# Altium PCB Tigershark 3D R1.3.PcbDoc (part 3 of 3)
Units mm, origin at the board's own origin, x right, y up, seen from the top; angles counter-clockwise.
Board outline 142.49 x 111.76 mm, 4 copper layers (Top Layer, Groun Plane, Power Plane, Bottom Layer); 253 components, 276 nets, 982 pads, 750 vias.
Unrouted connection lines stored in the file: 262.
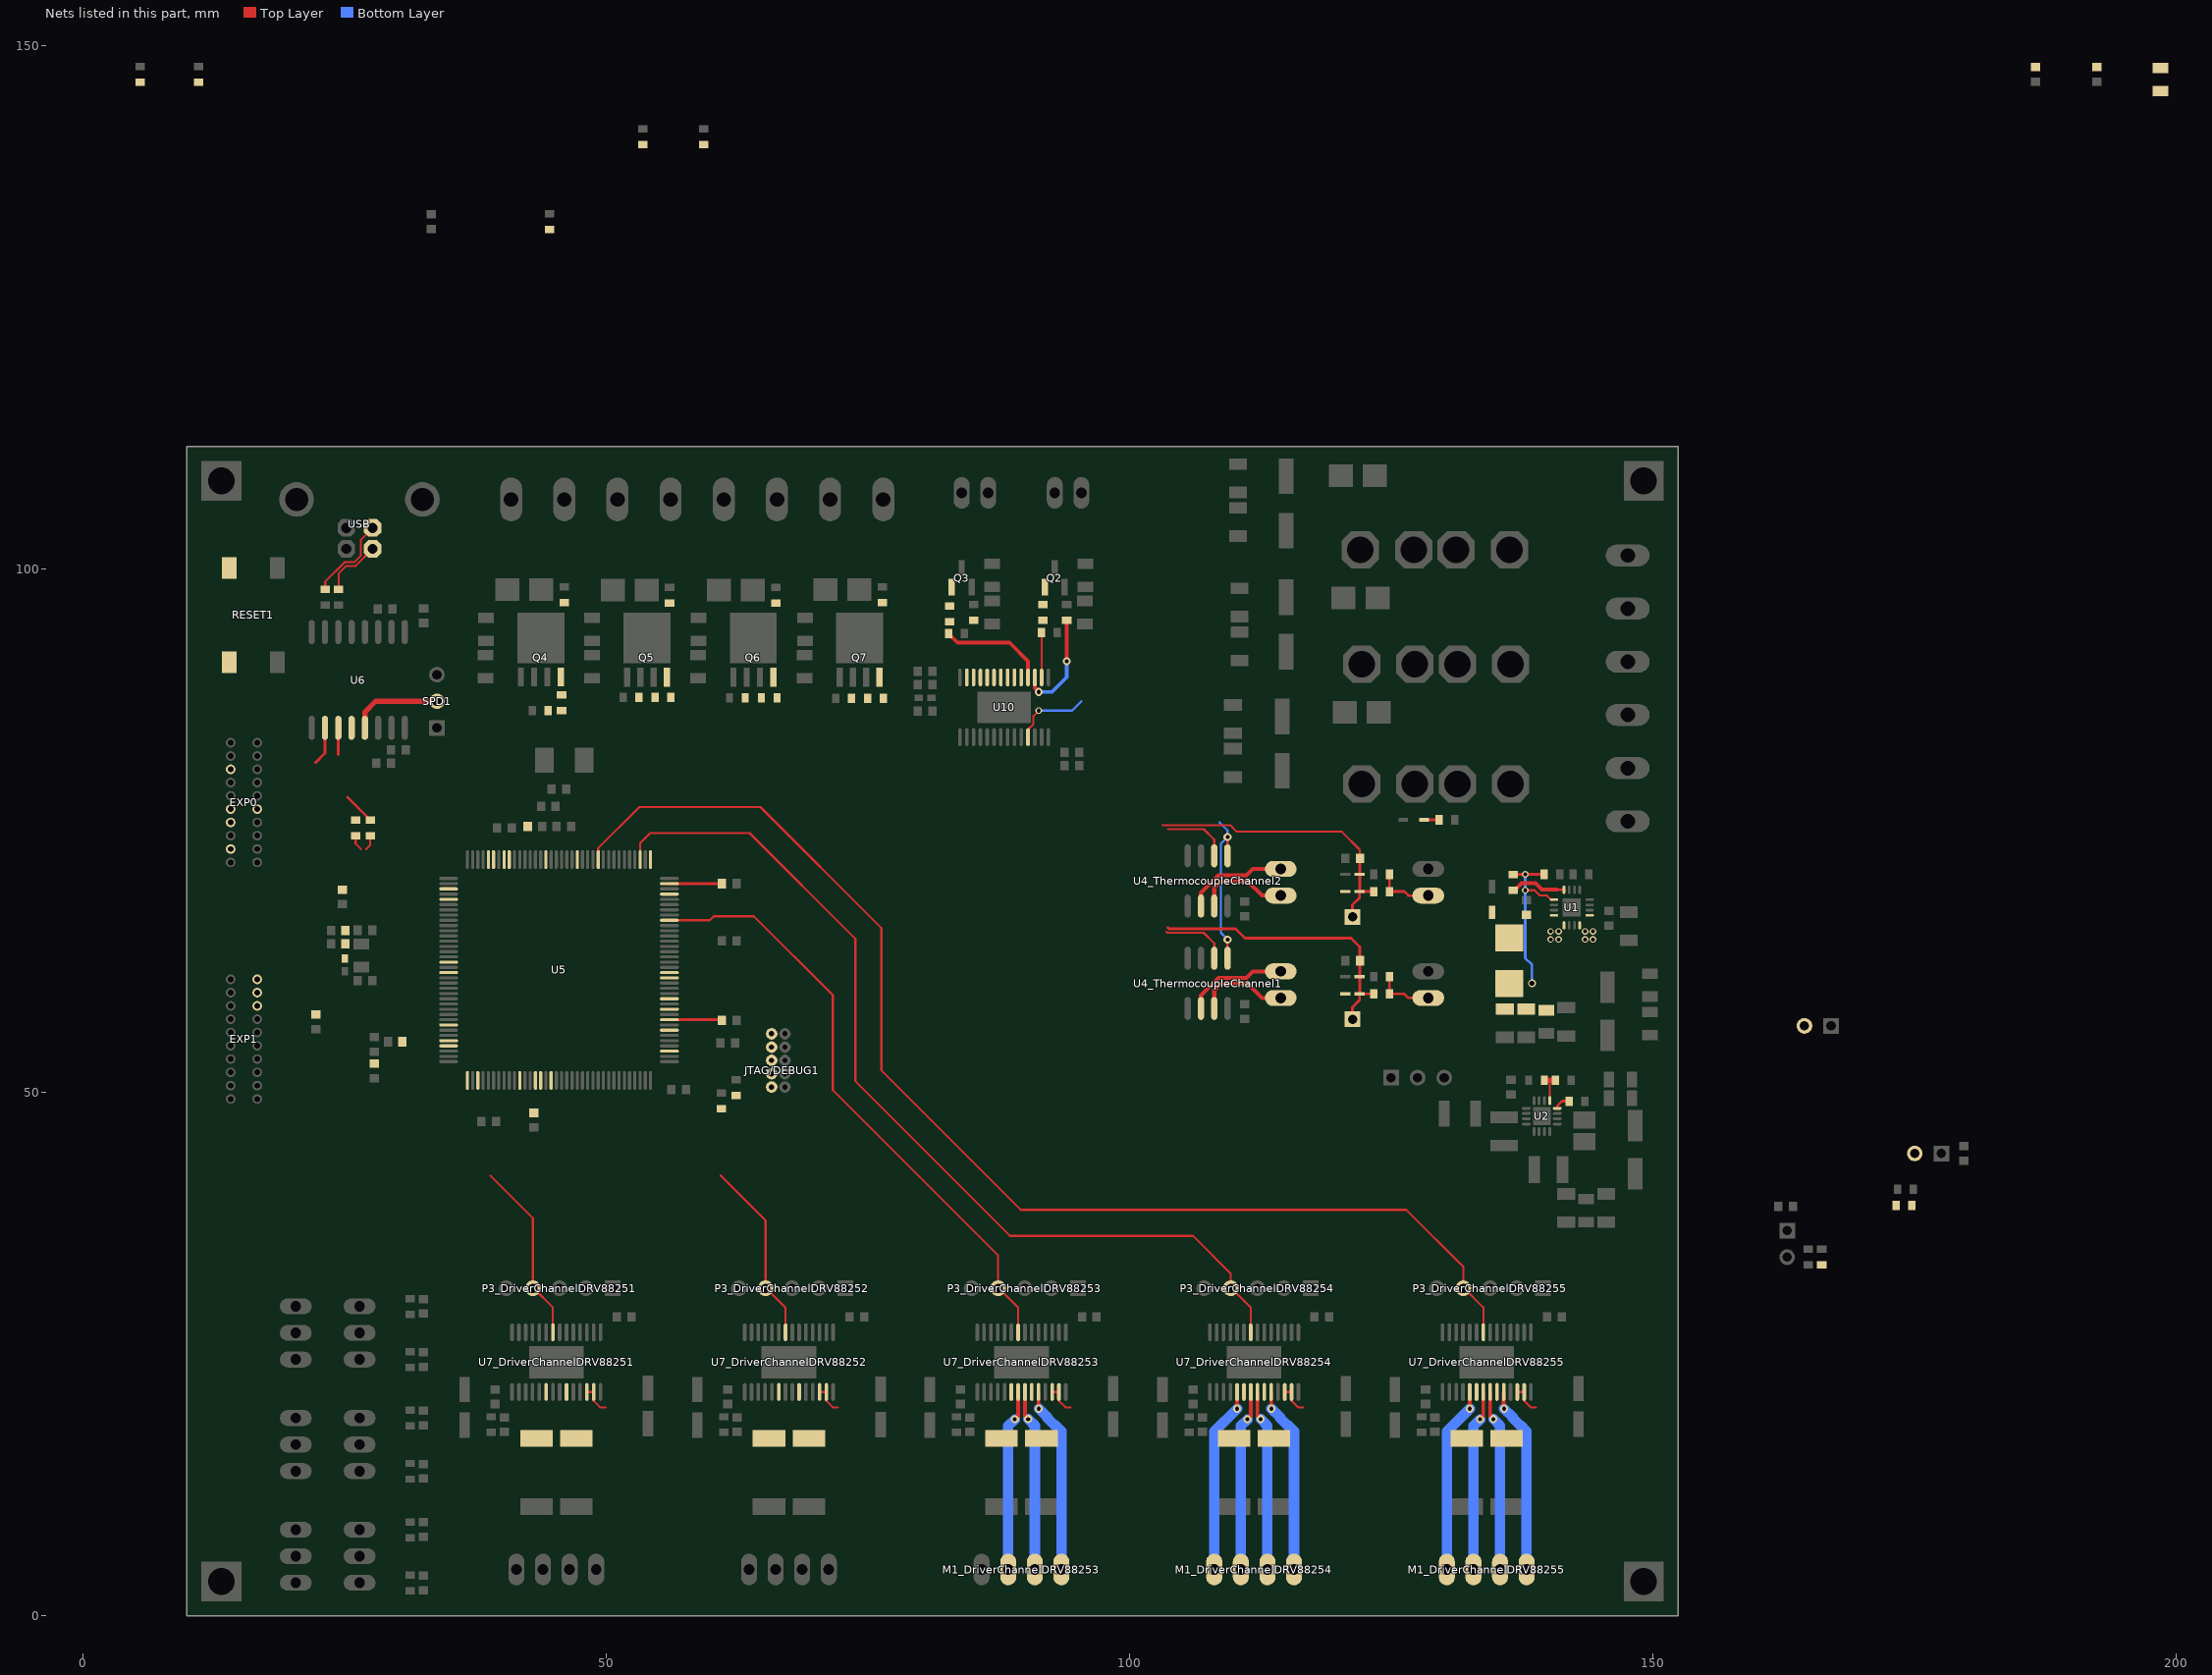
[diagram p5: the nets of this part, all layers, seen from the top]

## Via types
v1: diameter 0.635, hole 0.381, Top Layer to Bottom Layer, 336 vias
v2: diameter 0.762, hole 0.381, Top Layer to Bottom Layer, 305 vias
v3: diameter 0.5, hole 0.2, Top Layer to Bottom Layer, 90 vias
v4: diameter 1.27, hole 0.508, Top Layer to Bottom Layer, 15 vias
v5: diameter 0.762, hole 0.508, Top Layer to Bottom Layer, 3 vias
v6: diameter 1.27, hole 0.711, Top Layer to Bottom Layer, 1 vias

## Nets (pads, with @x,y where several pads share a name; then routed paths per layer and width w, separated by ;. In a path a pad name is that pad's centre, name@x,y a point inside that pad or via, vN(x,y) a via of type N, cw(c..) or ccw(c..) an arc to the next point about the centre after c; other vN are vias at no path point) (continued)
NetM1_DriverChannelDRV88253_2: M1_DriverChannelDRV88253.2 U7_DriverChannelDRV88253.7 | length 17.4
  Top Layer w0.356: v2(89.027,18.796) 89.337,19.106 U7_DriverChannelDRV88253.7@89.337,21.407
  Bottom Layer w0.991: M1_DriverChannelDRV88253.2@88.392,4.445 88.392,18.161 v2(89.027,18.796)
NetM1_DriverChannelDRV88253_3: M1_DriverChannelDRV88253.3 U7_DriverChannelDRV88253.8 | length 16.9
  Top Layer w0.356: 89.987,19.132 U7_DriverChannelDRV88253.8@89.987,21.407
  Bottom Layer w0.991: v2(90.297,18.822) 90.932,18.187 M1_DriverChannelDRV88253.3@90.932,4.445
NetM1_DriverChannelDRV88253_4: M1_DriverChannelDRV88253.4 U7_DriverChannelDRV88253.10 | length 17.8
  Top Layer w0.356: v2@91.287,19.888 U7_DriverChannelDRV88253.10@91.287,21.407
  Bottom Layer w0.991: v2(91.313,19.812) 92.126,18.999 92.126,18.926 92.84,18.212 92.913,18.212 93.472,17.653 M1_DriverChannelDRV88253.4@93.472,4.445
NetM1_DriverChannelDRV88254_1: M1_DriverChannelDRV88254.1 U7_DriverChannelDRV88254.5 | length 17.9
  Top Layer w0.356: v2(110.262,19.812) U7_DriverChannelDRV88254.5@110.262,21.407
  Bottom Layer w0.991: M1_DriverChannelDRV88254.1@108.077,4.445 108.077,17.627 v2(110.262,19.812)
NetM1_DriverChannelDRV88254_2: M1_DriverChannelDRV88254.2 U7_DriverChannelDRV88254.7 | length 17.4
  Top Layer w0.356: v2(111.252,18.796) 111.562,19.106 U7_DriverChannelDRV88254.7@111.562,21.407
  Bottom Layer w0.991: M1_DriverChannelDRV88254.2@110.617,4.445 110.617,18.161 v2(111.252,18.796)
NetM1_DriverChannelDRV88254_3: M1_DriverChannelDRV88254.3 U7_DriverChannelDRV88254.8 | length 16.9
  Top Layer w0.356: 112.212,19.132 U7_DriverChannelDRV88254.8@112.212,21.407
  Bottom Layer w0.991: v2(112.522,18.822) 113.157,18.187 M1_DriverChannelDRV88254.3@113.157,4.445
NetM1_DriverChannelDRV88254_4: M1_DriverChannelDRV88254.4 U7_DriverChannelDRV88254.10 | length 17.8
  Top Layer w0.356: v2@113.512,19.888 U7_DriverChannelDRV88254.10@113.512,21.407
  Bottom Layer w0.991: v2(113.538,19.812) 114.351,18.999 114.351,18.926 115.065,18.212 115.138,18.212 115.697,17.653 M1_DriverChannelDRV88254.4@115.697,4.445
NetM1_DriverChannelDRV88255_1: M1_DriverChannelDRV88255.1 U7_DriverChannelDRV88255.5 | length 17.9
  Top Layer w0.356: v2(132.487,19.812) U7_DriverChannelDRV88255.5@132.487,21.407
  Bottom Layer w0.991: M1_DriverChannelDRV88255.1@130.302,4.445 130.302,17.627 v2(132.487,19.812)
NetM1_DriverChannelDRV88255_2: M1_DriverChannelDRV88255.2 U7_DriverChannelDRV88255.7 | length 17.4
  Top Layer w0.356: v2(133.477,18.796) 133.787,19.106 U7_DriverChannelDRV88255.7@133.787,21.407
  Bottom Layer w0.991: M1_DriverChannelDRV88255.2@132.842,4.445 132.842,18.161 v2(133.477,18.796)
NetM1_DriverChannelDRV88255_3: M1_DriverChannelDRV88255.3 U7_DriverChannelDRV88255.8 | length 16.9
  Top Layer w0.356: 134.437,19.132 U7_DriverChannelDRV88255.8@134.437,21.407
  Bottom Layer w0.991: v2(134.747,18.822) 135.382,18.187 M1_DriverChannelDRV88255.3@135.382,4.445
NetM1_DriverChannelDRV88255_4: M1_DriverChannelDRV88255.4 U7_DriverChannelDRV88255.10 | length 17.8
  Top Layer w0.356: v2@135.737,19.888 U7_DriverChannelDRV88255.10@135.737,21.407
  Bottom Layer w0.991: v2(135.763,19.812) 136.576,18.999 136.576,18.926 137.29,18.212 137.363,18.212 137.922,17.653 M1_DriverChannelDRV88255.4@137.922,4.445
NetP2_ThermistorChannel1_1: P2_ThermistorChannel1.1 R13_ThermistorChannel1.1 R14_ThermistorChannel1.2 | length 5.5
  Top Layer w0.254: R13_ThermistorChannel1.1@124.829,61.087 R14_ThermistorChannel1.2@124.829,59.436 126.238,59.436 126.619,59.055 P2_ThermistorChannel1.1@128.524,59.055
NetP2_ThermistorChannel2_1: P2_ThermistorChannel2.1 R13_ThermistorChannel2.1 R14_ThermistorChannel2.2 | length 5.5
  Top Layer w0.254: R13_ThermistorChannel2.1@124.829,70.866 R14_ThermistorChannel2.2@124.829,69.215 126.238,69.215 126.619,68.834 P2_ThermistorChannel2.1@128.524,68.834
NetQ2_1: Q2.1 R45.2
NetQ3_1: Q3.1 R52.2
NetQ4_4: Q4.4 R58.2
NetQ5_4: Q5.4 R62.2
NetQ6_4: Q6.4 R66.2
NetQ7_4: Q7.4 R70.2
NetR12_1: R12.1 U2.4 | length 1.5
  Top Layer w0.254: U2.4@140.849,48.513 140.849,48.73 141.305,49.186 R12.1@141.977,49.186
NetR14_1: R14.1 U10.3 | length 10.2
  Top Layer w0.356: U10.3@90.932,89.674 90.932,88.673 v2(91.313,88.292) ; v2(93.98,91.213) R14.1@93.98,95.135
  Bottom Layer w0.356: v2(91.313,88.292) 92.583,88.292 93.98,89.689 v2(93.98,91.213)
NetR15_1: R15.1 R16.1 U5.129
NetR17_2: R17.2 U6.10 | length 3.7
  Top Layer w0.254: 22.213,81.534 23.114,82.435 U6.10@23.114,84.858
NetR18_2: R18.2 USB.2 | length 5.7
  Top Layer w0.203: R18.2@24.409,98.108 24.409,99.593 25.146,100.33 26.04,100.33 USB.2@27.666,101.956
NetR19_2: R19.2 U6.11 | length 5.6
  Top Layer w0.254: 24.384,82.308 U6.11@24.384,84.858 ; 25.261,78.232 R19.2@27.432,76.061
NetR20_2: R20.2 USB.3 | length 8.3
  Top Layer w0.203: R20.2@23.139,98.108 23.139,98.831 24.994,100.686 25.893,100.686 26.543,101.336 26.543,102.839 USB.3@27.666,103.962
NetR23_2: R23.2 R28.2 TRST1.2
NetR31_1: 
NetR32_DriverChannelDRV88251_2: R32_DriverChannelDRV88251.2 U7_DriverChannelDRV88251.9
NetR32_DriverChannelDRV88252_2: R32_DriverChannelDRV88252.2 U7_DriverChannelDRV88252.9
NetR32_DriverChannelDRV88253_2: R32_DriverChannelDRV88253.2 U7_DriverChannelDRV88253.9
NetR32_DriverChannelDRV88254_2: R32_DriverChannelDRV88254.2 U7_DriverChannelDRV88254.9
NetR32_DriverChannelDRV88255_2: R32_DriverChannelDRV88255.2 U7_DriverChannelDRV88255.9
NetR33_DriverChannelDRV88251_2: R33_DriverChannelDRV88251.2 U7_DriverChannelDRV88251.6
NetR33_DriverChannelDRV88252_2: R33_DriverChannelDRV88252.2 U7_DriverChannelDRV88252.6
NetR33_DriverChannelDRV88253_2: R33_DriverChannelDRV88253.2 U7_DriverChannelDRV88253.6
NetR33_DriverChannelDRV88254_2: R33_DriverChannelDRV88254.2 U7_DriverChannelDRV88254.6
NetR33_DriverChannelDRV88255_2: R33_DriverChannelDRV88255.2 U7_DriverChannelDRV88255.6
NetR37_1: R37.1 R38.2 U2.5 | length 3
  Top Layer w0.203: U2.5@140.124,49.238 140.124,51.18
  Top Layer w0.508: R38.2@139.616,51.192 R37.1@140.656,51.192
NetR45_1: R45.1 R46.1 U10.2 | length 4.3
  Top Layer w0.203: R46.1@91.579,93.98 91.582,93.977 U10.2@91.582,89.674
NetR48_1: R48.1 U10.5
NetR52_1: R52.1 R55.1 U10.4 | length 10.2
  Top Layer w0.356: R55.1@82.689,93.853 83.551,92.991 88.519,92.991 90.282,91.228 U10.4@90.282,89.674
NetR57_1: R57.1 U10.7
NetR58_1: R58.1 R59.1 U10.6
NetR61_1: R61.1 U10.9
NetR62_1: R62.1 R63.1 U10.8
NetR65_1: R65.1 U10.11
NetR66_1: R66.1 R67.1 U10.10
NetR69_1: R69.1 U10.13
NetR70_1: R70.1 R71.1 U10.12
NetSPD1_2: SPD1.2 U6.13 | length 8.8
  Top Layer w0.508: U6.13@26.924,84.858 26.924,86.36 27.962,87.398 SPD1.2@33.804,87.398
NetT2_ThermocoupleChannel1_1: T2_ThermocoupleChannel1.1 U4_ThermocoupleChannel1.3 | length 8.9
  Top Layer w0.381: U4_ThermocoupleChannel1.3@108.077,58.052 108.077,59.804 108.712,60.439 111.252,60.439 112.636,59.055 T2_ThermocoupleChannel1.1@114.427,59.055
NetT2_ThermocoupleChannel1_2: T2_ThermocoupleChannel1.2 U4_ThermocoupleChannel1.2 | length 9.8
  Top Layer w0.381: U4_ThermocoupleChannel1.2@106.807,58.052 106.807,59.296 108.483,60.972 111.15,60.972 111.773,61.595 T2_ThermocoupleChannel1.2@114.427,61.595
NetT2_ThermocoupleChannel2_1: T2_ThermocoupleChannel2.1 U4_ThermocoupleChannel2.3 | length 8.9
  Top Layer w0.381: U4_ThermocoupleChannel2.3@108.077,67.831 108.077,69.583 108.712,70.218 111.252,70.218 112.636,68.834 T2_ThermocoupleChannel2.1@114.427,68.834
NetT2_ThermocoupleChannel2_2: T2_ThermocoupleChannel2.2 U4_ThermocoupleChannel2.2 | length 9.8
  Top Layer w0.381: U4_ThermocoupleChannel2.2@106.807,67.831 106.807,69.075 108.483,70.751 111.15,70.751 111.773,71.374 T2_ThermocoupleChannel2.2@114.427,71.374
NetU5_140: U5.140 U6.12
OVREF: D1.2 D11_ThermistorChannel1.2 D11_ThermistorChannel2.2 R1.1 | length 1.4
  Top Layer w0.305: D1.2@128.127,76.073 R1.1@129.552,76.073
PG: R9.2 U1.8 | length 5.4
  Top Layer w0.254: 140.843,69.391 U1.8@141.49,69.391
  Top Layer w0.381: R9.2@136.562,69.391 136.828,69.391 137.439,70.002 138.786,70.002 139.397,69.391 140.843,69.391
POT_CS: U5.39
REF1: U7_DriverChannelDRV88251.12 U7_DriverChannelDRV88251.13 | length 2.9
  Top Layer w0.203: U7_DriverChannelDRV88251.12@48.137,21.407 U7_DriverChannelDRV88251.13@48.787,21.407 48.787,20.555 49.403,19.939 49.911,19.939
REF2: U7_DriverChannelDRV88252.12 U7_DriverChannelDRV88252.13 | length 2.9
  Top Layer w0.203: U7_DriverChannelDRV88252.12@70.362,21.407 U7_DriverChannelDRV88252.13@71.012,21.407 71.012,20.555 71.628,19.939 72.136,19.939
REF3: U7_DriverChannelDRV88253.12 U7_DriverChannelDRV88253.13 | length 2.9
  Top Layer w0.203: U7_DriverChannelDRV88253.12@92.587,21.407 U7_DriverChannelDRV88253.13@93.237,21.407 93.237,20.555 93.853,19.939 94.361,19.939
REF4: U7_DriverChannelDRV88254.12 U7_DriverChannelDRV88254.13 | length 2.9
  Top Layer w0.203: U7_DriverChannelDRV88254.12@114.812,21.407 U7_DriverChannelDRV88254.13@115.462,21.407 115.462,20.555 116.078,19.939 116.586,19.939
REF5: U7_DriverChannelDRV88255.12 U7_DriverChannelDRV88255.13 | length 2.9
  Top Layer w0.203: U7_DriverChannelDRV88255.12@137.037,21.407 U7_DriverChannelDRV88255.13@137.687,21.407 137.687,20.555 138.303,19.939 138.811,19.939
REF_EXP1: EXP0.7 U5.53
REF_EXP2: U5.47
RESET: C63.2 JTAG/DEBUG1.10 kRESET.2 R21.1 RESET1.1 U5.83
RXD1: EXP0.15 U5.32
SCLK: EXP0.3 U4_ThermocoupleChannel1.5 U4_ThermocoupleChannel2.5 U5.51 U10.25 | length 22.3
  Top Layer w0.203: U10.25@90.282,84.7 90.801,85.219 90.801,85.994 v1(91.317,86.51) ; U4_ThermocoupleChannel1.5@109.347,62.852 v2(109.347,64.643) ; U4_ThermocoupleChannel2.5@109.347,72.631 v2(109.347,74.422)
  Bottom Layer w0.203: v1(91.317,86.51) 94.489,86.51 95.382,87.403 ; 108.585,75.819 109.347,75.057 v2(109.347,74.422) 108.712,73.787 108.712,65.278 v2(109.347,64.643)
STEP1: P3_DriverChannelDRV88251.4 U5.75 U7_DriverChannelDRV88251.22 | length 17.5
  Top Layer w0.203: 38.937,42.051 42.977,38.011 P3_DriverChannelDRV88251.4@42.977,31.318 ; P3_DriverChannelDRV88251.4@42.989,31.369 44.887,29.471 U7_DriverChannelDRV88251.22@44.887,27.107
STEP2: P3_DriverChannelDRV88252.4 U5.90 U7_DriverChannelDRV88252.22 | length 17.6
  Top Layer w0.203: 60.909,42.088 65.202,37.795 P3_DriverChannelDRV88252.4@65.202,31.318 ; P3_DriverChannelDRV88252.4@65.215,31.369 67.112,29.471 U7_DriverChannelDRV88252.22@67.112,27.107
STEP3: P3_DriverChannelDRV88253.4 U5.100 U7_DriverChannelDRV88253.22 | length 58.5
  Top Layer w0.203: U5.100@56.016,66.472 59.883,66.472 60.264,66.853 64.094,66.853 71.628,59.319 71.628,50.247 87.427,34.448 P3_DriverChannelDRV88253.4@87.427,31.318 ; P3_DriverChannelDRV88253.4@87.439,31.369 89.337,29.471 U7_DriverChannelDRV88253.22@89.337,27.107
STEP4: P3_DriverChannelDRV88254.4 U5.111 U7_DriverChannelDRV88254.22 | length 90.2
  Top Layer w0.203: U5.111@53.216,72.272 53.216,73.841 54.178,74.803 63.678,74.803 73.787,64.694 73.787,51.105 88.57,36.322 106.045,36.322 109.652,32.715 P3_DriverChannelDRV88254.4@109.652,31.318 ; P3_DriverChannelDRV88254.4@109.664,31.369 111.562,29.471 U7_DriverChannelDRV88254.22@111.562,27.107
STEP5: P3_DriverChannelDRV88255.4 U5.119 U7_DriverChannelDRV88255.22 | length 118.6
  Top Layer w0.203: U5.119@49.216,72.272 49.216,73.361 53.147,77.292 64.709,77.292 76.276,65.725 76.276,52.136 89.601,38.811 126.421,38.811 131.877,33.355 P3_DriverChannelDRV88255.4@131.877,31.318 ; P3_DriverChannelDRV88255.4@131.889,31.369 133.787,29.471 U7_DriverChannelDRV88255.22@133.787,27.107
STEP_EXP1: EXP0.9
STEP_EXP2: EXP1.18
SW: C7.1 D5.2 L1.1 U1.1 U1.12 U1.13 U1.16
  other v1: 140.208,64.643 140.97,64.643 143.51,64.643 144.272,64.643 140.208,65.405 140.97,65.405 143.51,65.405 144.272,65.405
SW_OUT: C8.2 C29.1 FB2.1 L1.2 R7.2 R9.1 U1.9 | length 17
  Top Layer w0.203: v1(137.795,69.342) 138.684,69.342 139.192,68.834 139.858,68.834 140.251,68.441 U1.9@140.54,68.441
  Top Layer w0.254: R9.1@136.537,70.866 v1(137.795,70.866) R7.2@139.712,70.866
  Bottom Layer w0.254: v1(137.795,70.866) 137.795,62.865 138.43,62.23 v5(138.43,60.452)
TC_CS1: U4_ThermocoupleChannel1.6 | length 6.5
  Top Layer w0.203: 103.49,65.39 103.601,65.278 107.07,65.278 108.077,64.271 U4_ThermocoupleChannel1.6@108.077,62.852
TC_CS2: U4_ThermocoupleChannel2.6 | length 6.4
  Top Layer w0.203: 103.632,75.184 107.061,75.184 108.077,74.168 U4_ThermocoupleChannel2.6@108.077,72.631
TCK/SWDCLK: JTAG/DEBUG1.4 R25.1 U5.89
TDI: JTAG/DEBUG1.8 R27.1 U5.105
TDO/SWO: JTAG/DEBUG1.6 R26.1 U5.109
THERM_AN1: C30_ThermistorChannel1.2 D11_ThermistorChannel1.1 D12_ThermistorChannel1.2 R14_ThermistorChannel1.1 THM_TP1_ThermistorChannel1.1 U5.17 | length 27.7
  Top Layer w0.254: 103.632,65.786 103.759,65.659 110.109,65.659 110.998,64.77 121.158,64.77 121.985,63.943 C30_ThermistorChannel1.2@121.985,62.611 D11_ThermistorChannel1.1@121.985,59.461 ; THM_TP1_ThermistorChannel1.1@121.285,57.023 121.285,58.166 121.96,58.841 D11_ThermistorChannel1.1@121.96,59.436 R14_ThermistorChannel1.1@123.329,59.436
THERM_AN2: C30_ThermistorChannel2.2 D11_ThermistorChannel2.1 D12_ThermistorChannel2.2 R14_ThermistorChannel2.1 THM_TP1_ThermistorChannel2.1 U5.19 | length 27.9
  Top Layer w0.203: 103.124,75.565 109.601,75.565 110.236,74.93 120.269,74.93 121.985,73.214 C30_ThermistorChannel2.2@121.985,72.39
  Top Layer w0.254: THM_TP1_ThermistorChannel2.1@121.285,66.802 121.285,67.945 121.96,68.62 D11_ThermistorChannel2.1@121.96,69.215 R14_ThermistorChannel2.1@123.329,69.215 ; D11_ThermistorChannel2.1@121.985,69.24 C30_ThermistorChannel2.2@121.985,72.39
TMS/SWDIO: JTAG/DEBUG1.2 R24.1 U5.79
TRST: R23.1 U5.85
TXD1: EXP0.6 U5.37
UDM_N: R19.1 U5.137 | length 1.4
  Top Layer w0.203: 27.051,73.279 27.432,73.66 R19.1@27.432,74.561
UDP_P: R17.1 U5.136 | length 1.5
  Top Layer w0.203: R17.1@26.035,74.561 26.035,73.787 26.543,73.279
VDDIN: C54.2 C55.2 FB5.2 U5.5
VDDOUT: C36.2 C37.2 C38.2 C39.2 C40.2 C41.2 C42.2 FB4.1 U5.3 U5.29 U5.33 U5.50 U5.81 U5.107 U5.123 | length 10
  Top Layer w0.254: U5.81@56.016,56.972 60.946,56.972 C36.2@61.022,56.896 ; U5.107@56.016,69.972 61.017,69.972 C40.2@61.022,69.977
VDDPLL: C32.2 C33.2 FB4.2 U5.139
pads on no net: JTAG/DEBUG1.1@67.856,48.626 JTAG/DEBUG1.7 R22.1 U1.6 U1.7 U4_ThermocoupleChannel1.8 U4_ThermocoupleChannel2.8 U5.1 U5.2 U5.4 U5.6 U5.7 U5.10 U5.11 U5.12 U5.13 U5.14 U5.15 U5.16 U5.18 U5.20 U5.21 U5.28 U5.31 U5.34 U5.35 U5.40 U5.41 U5.46 U5.48 U5.54 U5.56 U5.58 U5.59 U5.62 U5.66 U5.67 U5.69 U5.70 U5.124 U5.125 U5.126 U5.127 U5.128 U5.130 U5.131 U5.132 U5.133 U5.144 U7_DriverChannelDRV88251.18 U7_DriverChannelDRV88251.19 U7_DriverChannelDRV88251.23 U7_DriverChannelDRV88251.27 U7_DriverChannelDRV88252.18 U7_DriverChannelDRV88252.19 U7_DriverChannelDRV88252.23 U7_DriverChannelDRV88252.27 U7_DriverChannelDRV88253.18 U7_DriverChannelDRV88253.19 U7_DriverChannelDRV88253.23 U7_DriverChannelDRV88253.27 U7_DriverChannelDRV88254.18 U7_DriverChannelDRV88254.19 U7_DriverChannelDRV88254.23 U7_DriverChannelDRV88254.27 U7_DriverChannelDRV88255.18 U7_DriverChannelDRV88255.19 U7_DriverChannelDRV88255.23 U7_DriverChannelDRV88255.27
copper on no net: | length 7.5
  Bottom Layer w0.203: 49.911,22.352 50.8,21.463 ; 72.136,22.352 73.025,21.463 ; 94.361,22.352 95.25,21.463 ; 116.586,22.352 117.475,21.463 ; 138.811,22.352 139.7,21.463 138.811,22.352

## Polygon pours and split planes (outlines as drawn)
+12VCC2 on Top Layer "Top Layer-No Net" (solid, remove dead copper, pour order 174): 18 vertices, not listed, extent 102.108,99.314 129.159,111.125
+12VCC3 on Top Layer "Top Layer-No Net" (solid, remove dead copper, pour order 176): 129.159,88.392 129.159,93.472 121.793,93.472 121.793,99.187 111.633,99.187 111.633,97.409 109.347,97.409 109.347,101.6 102.108,101.6 102.108,92.075 114.046,92.075 114.046,94.107 115.824,94.107 115.824,88.392
+12VCC1 on Top Layer "Top Layer-No Net" (solid, remove dead copper, pour order 182): 20 vertices, not listed, extent 102.108,76.962 129.286,91.313
NetF3_1 on Top Layer "Top Layer-No Net" (solid, remove dead copper, pour order 180): 151.765,78.359 151.765,82.55 129.286,82.55 129.286,76.962 143.764,76.962 143.764,78.359
GND on Top Layer "Top Layer-No Net" (solid, remove dead copper, pour order 164): 121.793,111.125 121.793,104.521 146.05,104.521 146.05,111.125
NetF1_1 on Top Layer "Top Layer-No Net" (solid, remove dead copper, pour order 169): 129.286,93.472 129.286,88.392 151.765,88.392 151.765,93.472
NetF2_1 on Top Layer "Top Layer-No Net" (solid, remove dead copper, pour order 172): 129.159,104.267 129.159,99.314 151.765,99.314 151.765,104.267
GND on Top Layer "Top Layer-No Net" (solid, remove dead copper, pour order 166): 122.174,88.392 122.174,82.55 152.527,82.55 152.527,88.392
GND on Top Layer "Top Layer-No Net" (solid, remove dead copper, pour order 166): 122.047,99.314 122.047,93.472 152.4,93.472 152.4,99.314
NetR33_DriverChannelDRV88251_2 on Top Layer "Mechanical 15-No Net" (solid, remove dead copper, pour order 76): 41.707,16.383 44.958,16.383 44.958,18.288 44.399,18.288 44.399,19.176 44.399,21.869 44.094,21.869 44.094,19.558 41.707,18.313
NetR32_DriverChannelDRV88251_2 on Top Layer "Mechanical 15-No Net" (solid, remove dead copper, pour order 85): 48.743,16.383 45.499,16.383 45.499,18.542 45.999,18.542 45.999,21.946 46.33,21.946 46.33,19.812 48.743,18.237
+12VCC1 on Top Layer "Top Layer-No Net" (solid, remove dead copper, pour order 131): 34.29,19.685 34.29,2.54 38.1,2.54 38.1,16.891 40.894,16.891 40.894,18.415 38.354,18.415 38.354,19.685
+12VCC1 on Top Layer "Top Layer-No Net" (solid, remove dead copper, pour order 133): 56.515,19.685 52.07,19.685 52.07,2.54 56.515,2.54
GND on Top Layer "Top Layer-No Net" (solid, remove dead copper, pour order 92): 19 vertices, not listed, extent 34.544,20.574 55.88,29.083
GND on Top Layer "Top Layer-No Net" (solid, remove dead copper, pour order 92): 19 vertices, not listed, extent 123.444,20.574 144.78,29.083
+12VCC1 on Top Layer "Top Layer-No Net" (solid, remove dead copper, pour order 133): 145.415,19.685 140.97,19.685 140.97,2.54 145.415,2.54
+12VCC1 on Top Layer "Top Layer-No Net" (solid, remove dead copper, pour order 131): 123.19,19.685 123.19,2.54 127,2.54 127,16.891 129.794,16.891 129.794,18.415 127.254,18.415 127.254,19.685
NetR32_DriverChannelDRV88255_2 on Top Layer "Mechanical 15-No Net" (solid, remove dead copper, pour order 85): 137.643,16.383 134.399,16.383 134.399,18.542 134.899,18.542 134.899,21.946 135.23,21.946 135.23,19.812 137.643,18.237
NetR33_DriverChannelDRV88255_2 on Top Layer "Mechanical 15-No Net" (solid, remove dead copper, pour order 76): 130.607,16.383 133.858,16.383 133.858,18.288 133.299,18.288 133.299,19.176 133.299,21.869 132.994,21.869 132.994,19.558 130.607,18.313
NetR33_DriverChannelDRV88254_2 on Top Layer "Mechanical 15-No Net" (solid, remove dead copper, pour order 76): 108.382,16.383 111.633,16.383 111.633,18.288 111.074,18.288 111.074,19.176 111.074,21.869 110.769,21.869 110.769,19.558 108.382,18.313
NetR32_DriverChannelDRV88254_2 on Top Layer "Mechanical 15-No Net" (solid, remove dead copper, pour order 85): 115.418,16.383 112.174,16.383 112.174,18.542 112.674,18.542 112.674,21.946 113.005,21.946 113.005,19.812 115.418,18.237
+12VCC1 on Top Layer "Top Layer-No Net" (solid, remove dead copper, pour order 131): 100.965,19.685 100.965,2.54 104.775,2.54 104.775,16.891 107.569,16.891 107.569,18.415 105.029,18.415 105.029,19.685
+12VCC1 on Top Layer "Top Layer-No Net" (solid, remove dead copper, pour order 133): 123.19,19.685 118.745,19.685 118.745,2.54 123.19,2.54
GND on Top Layer "Top Layer-No Net" (solid, remove dead copper, pour order 92): 19 vertices, not listed, extent 101.219,20.574 122.555,29.083
NetR33_DriverChannelDRV88253_2 on Top Layer "Mechanical 15-No Net" (solid, remove dead copper, pour order 76): 86.157,16.383 89.408,16.383 89.408,18.288 88.849,18.288 88.849,19.176 88.849,21.869 88.544,21.869 88.544,19.558 86.157,18.313
NetR32_DriverChannelDRV88253_2 on Top Layer "Mechanical 15-No Net" (solid, remove dead copper, pour order 85): 93.193,16.383 89.949,16.383 89.949,18.542 90.449,18.542 90.449,21.946 90.78,21.946 90.78,19.812 93.193,18.237
+12VCC1 on Top Layer "Top Layer-No Net" (solid, remove dead copper, pour order 131): 78.74,19.685 78.74,2.54 82.55,2.54 82.55,16.891 85.344,16.891 85.344,18.415 82.804,18.415 82.804,19.685
+12VCC1 on Top Layer "Top Layer-No Net" (solid, remove dead copper, pour order 133): 100.965,19.685 96.52,19.685 96.52,2.54 100.965,2.54
GND on Top Layer "Top Layer-No Net" (solid, remove dead copper, pour order 92): 19 vertices, not listed, extent 78.994,20.574 100.33,29.083
GND on Top Layer "Top Layer-No Net" (solid, remove dead copper, pour order 92): 19 vertices, not listed, extent 56.769,20.574 78.105,29.083
+12VCC1 on Top Layer "Top Layer-No Net" (solid, remove dead copper, pour order 133): 78.74,19.685 74.295,19.685 74.295,2.54 78.74,2.54
+12VCC1 on Top Layer "Top Layer-No Net" (solid, remove dead copper, pour order 131): 56.515,19.685 56.515,2.54 60.325,2.54 60.325,16.891 63.119,16.891 63.119,18.415 60.579,18.415 60.579,19.685
NetD18_1 on Top Layer "Top Layer-No Net" (solid, remove dead copper, pour order 66): 17 vertices, not listed, extent 68.072,88.8 77.724,111.279
NetD16_1 on Top Layer "Top Layer-No Net" (solid, remove dead copper, pour order 67): 17 vertices, not listed, extent 57.912,88.8 67.564,111.279
NetD14_1 on Top Layer "Top Layer-No Net" (solid, remove dead copper, pour order 68): 17 vertices, not listed, extent 47.752,88.8 57.404,111.279
NetD12_1 on Top Layer "Top Layer-No Net" (solid, remove dead copper, pour order 69): 17 vertices, not listed, extent 37.592,88.8 47.244,111.279
NetC4_1 on Top Layer "Top Layer-No Net" (solid, remove dead copper, pour order 109): 144.607,46.265 142.27,46.265 142.27,45.503 140.721,45.503 140.721,41.134 140.691,38.354 142.723,38.354 142.723,36.957 144.501,36.957 144.501,39.116 142.596,39.116 142.596,41.148 144.607,41.134
+12VCC2 on Top Layer "Top Layer-No Net" (solid, remove dead copper, pour order 80): 72.898,111.279 68.199,111.279 68.199,94.896 71.755,94.896 71.755,96.801 72.898,96.801 72.898,111.279
+12VCC2 on Top Layer "Top Layer-No Net" (solid, remove dead copper, pour order 77): 62.738,111.279 58.039,111.279 58.039,94.896 61.595,94.896 61.595,96.801 62.738,96.801 62.738,111.279
+12VCC2 on Top Layer "Top Layer-No Net" (solid, remove dead copper, pour order 74): 52.578,111.279 47.879,111.279 47.879,94.896 51.435,94.896 51.435,96.801 52.578,96.801 52.578,111.279
+12VCC3 on Top Layer "Top Layer-No Net" (solid, remove dead copper, pour order 60): 42.418,111.279 37.719,111.279 37.719,94.896 41.275,94.896 41.275,96.801 42.418,96.801 42.418,111.279
+5VCC on Top Layer "Top Layer-No Net" (solid, remove dead copper, pour order 62): 150.47,56.896 150.47,52.324 146.152,52.324 146.152,53.848 139.04,53.848 139.04,56.896
3.3VCC on Top Layer "Top Layer-No Net" (solid, remove dead copper, pour order 64): 142.85,39.116 146.66,39.116 146.66,36.957 149.2,36.957 149.2,43.942 146.279,43.942 146.279,50.292 144.882,50.292 144.882,41.021 142.85,41.021
SW_OUT on Top Layer "Top Layer-No Net" (solid, remove dead copper, pour order 61): 134.849,57.277 134.849,61.849 137.643,61.849 137.643,58.928 136.754,58.928 136.754,58.674 140.564,58.674 140.564,57.277
NetR32_DriverChannelDRV88252_2 on Top Layer "Mechanical 15-No Net" (solid, remove dead copper, pour order 85): 70.968,16.383 67.724,16.383 67.724,18.542 68.224,18.542 68.224,21.946 68.555,21.946 68.555,19.812 70.968,18.237
NetR33_DriverChannelDRV88252_2 on Top Layer "Mechanical 15-No Net" (solid, remove dead copper, pour order 76): 63.932,16.383 67.183,16.383 67.183,18.288 66.624,18.288 66.624,19.176 66.624,21.869 66.319,21.869 66.319,19.558 63.932,18.313
NetC22_1 on Top Layer "Top Layer-No Net" (solid, remove dead copper, pour order 104): 133.641,48.195 138.308,48.221 138.308,46.824 138.765,46.824 138.765,45.833 137.469,45.833 137.469,47.078 133.641,47.052 133.641,46.544 132.498,46.544 132.498,49.338 133.641,49.338
+12VCC1 on Top Layer "Mechanical 15-No Net" (solid, pour order 70): 143.383,67.31 143.383,68.072 144.907,68.072 144.907,70.866 148.717,70.866 148.717,66.675 146.558,66.675 146.558,66.929 144.907,66.929 144.907,67.31
SW on Top Layer "Mechanical 15-No Net" (solid, pour order 81): 144.78,67.056 143.129,67.056 143.129,66.675 142.875,66.675 142.875,64.135 144.78,64.135
GND on Top Layer "Mechanical 15-No Net" (solid, pour order 88): 142.621,66.675 141.859,66.675 141.859,63.119 148.844,63.119 148.844,65.532 146.558,65.532 146.558,66.421 144.907,66.421 144.907,64.008 142.621,64.008
+12VCC1 on Top Layer "Mechanical 15-No Net" (solid, remove dead copper, pour order 71): 141.097,67.183 141.097,67.691 140.208,67.691 140.208,67.945 138.557,67.945 138.557,66.929 140.208,66.929 140.208,67.183
SW on Top Layer "Mechanical 15-No Net" (solid, pour order 72): 17 vertices, not listed, extent 134.112,63.373 141.605,68.072
NetL2_1 on Top Layer "Top Layer-No Net" (solid, remove dead copper, pour order 105): 140.441,48.221 140.441,46.798 144.454,46.798 144.454,48.221
NetC24_2 on Top Layer "Top Layer-No Net" (solid, remove dead copper, pour order 107): 138.231,48.652 138.231,48.398 137.596,48.398 135.945,48.398 135.945,50.303 136.961,50.303 136.961,48.652
GND on Top Layer "Top Layer-No Net" (solid, remove dead copper, pour order 106): 139.476,47.001 140.238,47.001 140.238,41.134 134.294,41.134 134.294,45.604 137.241,45.604 137.241,44.563 139.476,44.563
GND on Top Layer "Top Layer-No Net" (solid, remove dead copper, pour order 108): 134.345,51.65 134.345,48.424 135.742,48.424 135.742,50.608 138.46,50.608 138.46,48.576 139.832,48.576 139.832,49.821 139.095,49.821 139.095,51.65
NetF1_1 on Bottom Layer "Top Layer-No Net" (solid, remove dead copper, pour order 169): 129.286,93.472 129.286,88.392 151.765,88.392 151.765,93.472
NetF2_1 on Bottom Layer "Top Layer-No Net" (solid, remove dead copper, pour order 172): 129.159,104.267 129.159,99.314 151.765,99.314 151.765,104.267
SW on Bottom Layer "Mechanical 15-No Net" (solid, pour order 65): 139.7,66.167 144.78,66.167 144.78,64.135 139.7,64.135
+12VCC1 on Bottom Layer "Mechanical 15-No Net" (solid, pour order 63): 146.558,67.736 145.034,67.736 145.034,68.961 140.208,68.961 140.208,67.056 138.557,67.056 138.557,70.866 146.558,70.866
INPUT_GND on Groun Plane (split plane): 25.906,83.766 25.906,69.979 10.416,69.979 10.416,86.739 22.933,86.739
GND on Groun Plane (split plane): 19 vertices, not listed, extent 10.416,0.51 151.89,111.25
3.3VCC on Power Plane (split plane): 146.175,67.617 145.417,67.617 145.417,68.984 146.175,68.984
3.3VCC on Power Plane (split plane): 49 vertices, not listed, extent 137.947,68.325 139.675,70.054
+5VCC on Power Plane (split plane): 141.349,57.025 130.304,57.025 130.304,61.414 130.775,61.884 130.803,61.926 130.812,61.976 130.812,74.394 141.349,74.394
3.3VCC on Power Plane (split plane): 57 vertices, not listed, extent 125.179,97.467 128.313,100.602
3.3VCC on Power Plane (split plane): 57 vertices, not listed, extent 125.306,88.958 128.44,92.093
3.3VCC on Power Plane (split plane): 43 vertices, not listed, extent 131.188,18.601 132.029,20.515
3.3VCC on Power Plane (split plane): 41 vertices, not listed, extent 137.465,18.522 138.76,20.34
3.3VCC on Power Plane (split plane): 41 vertices, not listed, extent 130.099,18.649 131.394,20.467
3.3VCC on Power Plane (split plane): 43 vertices, not listed, extent 129.464,18.601 130.305,20.515
3.3VCC on Power Plane (split plane): 57 vertices, not listed, extent 125.052,105.087 128.186,108.222
3.3VCC on Power Plane (split plane): 57 vertices, not listed, extent 120.226,88.958 123.36,92.093
3.3VCC on Power Plane (split plane): 57 vertices, not listed, extent 119.972,105.087 123.106,108.222
3.3VCC on Power Plane (split plane): 57 vertices, not listed, extent 120.099,97.467 123.233,100.602
3.3VCC on Power Plane (split plane): 43 vertices, not listed, extent 108.963,18.601 109.804,20.515
3.3VCC on Power Plane (split plane): 41 vertices, not listed, extent 115.24,18.522 116.535,20.34
3.3VCC on Power Plane (split plane): 41 vertices, not listed, extent 107.874,18.649 109.169,20.467
3.3VCC on Power Plane (split plane): 43 vertices, not listed, extent 107.239,18.601 108.08,20.515
3.3VCC on Power Plane (split plane): 46 vertices, not listed, extent 138.608,16.696 139.449,18.61
3.3VCC on Power Plane (split plane): 43 vertices, not listed, extent 140.332,16.696 141.173,18.61
3.3VCC on Power Plane (split plane): 43 vertices, not listed, extent 136.83,18.474 137.671,20.388
3.3VCC on Power Plane (split plane): 45 vertices, not listed, extent 138.554,18.474 139.395,20.388
3.3VCC on Power Plane (split plane): 41 vertices, not listed, extent 139.243,16.744 140.538,18.562
3.3VCC on Power Plane (split plane): 43 vertices, not listed, extent 129.156,16.696 129.997,18.61
3.3VCC on Power Plane (split plane): 41 vertices, not listed, extent 128.067,16.744 129.362,18.562
3.3VCC on Power Plane (split plane): 43 vertices, not listed, extent 127.432,16.696 128.273,18.61
3.3VCC on Power Plane (split plane): 45 vertices, not listed, extent 116.383,16.696 117.224,18.61
3.3VCC on Power Plane (split plane): 43 vertices, not listed, extent 118.107,16.696 118.948,18.61
3.3VCC on Power Plane (split plane): 43 vertices, not listed, extent 114.605,18.474 115.446,20.388
3.3VCC on Power Plane (split plane): 45 vertices, not listed, extent 116.329,18.474 117.17,20.388
3.3VCC on Power Plane (split plane): 41 vertices, not listed, extent 117.018,16.744 118.313,18.562
3.3VCC on Power Plane (split plane): 43 vertices, not listed, extent 106.931,16.696 107.772,18.61
3.3VCC on Power Plane (split plane): 41 vertices, not listed, extent 105.842,16.744 107.137,18.562
3.3VCC on Power Plane (split plane): 43 vertices, not listed, extent 105.207,16.696 106.048,18.61
3.3VCC on Power Plane (split plane): 43 vertices, not listed, extent 85.014,18.601 85.855,20.515
3.3VCC on Power Plane (split plane): 43 vertices, not listed, extent 86.738,18.601 87.579,20.515
+12VCC2 on Power Plane (split plane): 151.89,103.38 96.139,103.38 96.089,103.371 96.047,103.343 88.592,95.887 14.48,95.887 14.48,111.25 151.89,111.25
+12VCC3 on Power Plane (split plane): 36 vertices, not listed, extent 10.416,81.028 112.393,111.25
3.3VCC on Power Plane (split plane): 41 vertices, not listed, extent 93.015,18.522 94.31,20.34
3.3VCC on Power Plane (split plane): 45 vertices, not listed, extent 94.104,18.474 94.945,20.388
3.3VCC on Power Plane (split plane): 41 vertices, not listed, extent 85.649,18.649 86.944,20.467
3.3VCC on Power Plane (split plane): 43 vertices, not listed, extent 92.38,18.474 93.221,20.388
3.3VCC on Power Plane (split plane): 43 vertices, not listed, extent 42.288,18.601 43.129,20.515
3.3VCC on Power Plane (split plane): 49 vertices, not listed, extent 62.789,18.593 64.719,20.523
3.3VCC on Power Plane (split plane): 41 vertices, not listed, extent 41.199,18.649 42.494,20.467
3.3VCC on Power Plane (split plane): 43 vertices, not listed, extent 40.564,18.601 41.405,20.515
3.3VCC on Power Plane (split plane): 45 vertices, not listed, extent 49.654,18.474 50.495,20.388
3.3VCC on Power Plane (split plane): 49 vertices, not listed, extent 70.155,18.466 72.085,20.396
3.3VCC on Power Plane (split plane): 41 vertices, not listed, extent 48.565,18.522 49.86,20.34
3.3VCC on Power Plane (split plane): 43 vertices, not listed, extent 47.93,18.474 48.771,20.388
3.3VCC on Power Plane (split plane): 45 vertices, not listed, extent 94.158,16.696 94.999,18.61
3.3VCC on Power Plane (split plane): 43 vertices, not listed, extent 95.882,16.696 96.723,18.61
3.3VCC on Power Plane (split plane): 58 vertices, not listed, extent 10.416,0.51 151.89,103.122
3.3VCC on Power Plane (split plane): 18 vertices, not listed, extent 31.244,0.51 151.89,86.967
3.3VCC on Power Plane (split plane): 41 vertices, not listed, extent 94.793,16.744 96.088,18.562
3.3VCC on Power Plane (split plane): 43 vertices, not listed, extent 84.706,16.696 85.547,18.61
3.3VCC on Power Plane (split plane): 41 vertices, not listed, extent 83.617,16.744 84.912,18.562
3.3VCC on Power Plane (split plane): 43 vertices, not listed, extent 82.982,16.696 83.823,18.61
3.3VCC on Power Plane (split plane): 49 vertices, not listed, extent 60.757,16.688 62.687,18.618
3.3VCC on Power Plane (split plane): 49 vertices, not listed, extent 71.933,16.688 73.863,18.618
3.3VCC on Power Plane (split plane): 45 vertices, not listed, extent 49.708,16.696 50.549,18.61
3.3VCC on Power Plane (split plane): 43 vertices, not listed, extent 51.432,16.696 52.273,18.61
3.3VCC on Power Plane (split plane): 41 vertices, not listed, extent 50.343,16.744 51.638,18.562
3.3VCC on Power Plane (split plane): 43 vertices, not listed, extent 40.256,16.696 41.097,18.61
3.3VCC on Power Plane (split plane): 41 vertices, not listed, extent 39.167,16.744 40.462,18.562
3.3VCC on Power Plane (split plane): 43 vertices, not listed, extent 38.532,16.696 39.373,18.61

## Keep-outs
Keep-Out Layer:
  lines w0.254: 10.541,0.635 10.541,111.125 151.765,111.125 151.765,0.635 10.541,0.635

## Other copper
Groun Plane (plane layer: these items are gaps in the copper):
  lines w0.254: 0,69.85 26.035,69.85 26.035,83.82 22.987,86.868 0,86.868
Power Plane (plane layer: these items are gaps in the copper):
  circle w0.254: c50.673,17.653 r1.092
  circle w0.254: c48.895,19.431 r1.092
  circle w0.254: c39.497,17.653 r1.092
  circle w0.254: c41.529,19.558 r1.092
  circle w0.254: c139.573,17.653 r1.092
  circle w0.254: c137.795,19.431 r1.092
  circle w0.254: c138.43,19.431 r1.092
  circle w0.254: c140.208,17.653 r1.092
  circle w0.254: c128.397,17.653 r1.092
  circle w0.254: c130.429,19.558 r1.092
  circle w0.254: c129.032,17.653 r1.092
  circle w0.254: c131.064,19.558 r1.092
  circle w0.254: c139.573,17.653 r1.092
  circle w0.254: c137.795,19.431 r1.092
  circle w0.254: c128.397,17.653 r1.092
  circle w0.254: c130.429,19.558 r1.092
  circle w0.254: c117.348,17.653 r1.092
  circle w0.254: c115.57,19.431 r1.092
  circle w0.254: c106.172,17.653 r1.092
  circle w0.254: c108.204,19.558 r1.092
  circle w0.254: c95.123,17.653 r1.092
  circle w0.254: c93.345,19.431 r1.092
  circle w0.254: c83.947,17.653 r1.092
  circle w0.254: c85.979,19.558 r1.092
  circle w0.254: c121.793,90.526 r1.694
  circle w0.254: c126.873,90.526 r1.694
  circle w0.254: c121.666,99.035 r1.694
  circle w0.254: c126.746,99.035 r1.694
  circle w0.254: c126.619,106.655 r1.694
  circle w0.254: c121.539,106.655 r1.694
  circle w0.254: c138.811,69.19 r0.992
  circle w0.254: c129.032,17.653 r1.092
  circle w0.254: c131.064,19.558 r1.092
  circle w0.254: c138.43,19.431 r1.092
  circle w0.254: c140.208,17.653 r1.092
  circle w0.254: c106.807,17.653 r1.092
  circle w0.254: c108.839,19.558 r1.092
  circle w0.254: c116.205,19.431 r1.092
  circle w0.254: c117.983,17.653 r1.092
  circle w0.254: c84.582,17.653 r1.092
  circle w0.254: c86.614,19.558 r1.092
  circle w0.254: c93.98,19.431 r1.092
  circle w0.254: c95.758,17.653 r1.092
  circle w0.254: c61.722,17.653 r1.092
  circle w0.254: c63.754,19.558 r1.092
  circle w0.254: c71.12,19.431 r1.092
  circle w0.254: c72.898,17.653 r1.092
  circle w0.254: c51.308,17.653 r1.092
  circle w0.254: c49.53,19.431 r1.092
  circle w0.254: c42.164,19.558 r1.092
  circle w0.254: c40.132,17.653 r1.092
  lines w0.254: -0.127,93.091 63.246,93.091 63.246,90.043 70.231,90.043 76.327,90.043 76.327,93.091 95.504,93.091 97.79,90.805 97.79,80.899 112.522,80.899 112.522,103.251 96.139,103.251 88.646,95.758 14.351,95.758 14.351,111.76 ; 31.115,0 31.115,26.035 141.478,26.035 141.478,74.524 130.683,74.524 ; 112.395,103.251 152.273,103.251 ; 141.478,56.896 130.175,56.896 130.175,61.468 130.683,61.976 130.683,74.524 ; 152.527,87.097 130.683,87.097 130.683,74.524 ; 145.288,67.488 146.304,67.488 146.304,69.113 145.288,69.113 145.288,67.488

## Silkscreen, mask and mechanical layers (free items; w line width, h text height)
Top Overlay:
  lines w0.152: 37.719,102.897 37.719,100.23 48.514,100.23 ; 48.514,102.77 48.514,100.23 ; 58.674,102.897 58.674,100.23 ; 68.834,102.897 68.834,100.23 ; 79.629,102.897 79.629,100.23 68.834,100.23 ; 139.954,72.758 139.954,83.553 ; 143.764,83.553 139.954,83.553 ; 143.764,93.713 139.954,93.713 ; 143.764,104.508 139.954,104.508 139.954,93.713 ; 48.514,100.23 58.674,100.23 ; 58.674,100.23 68.834,100.23 ; 139.954,83.553 139.954,93.713
  lines w0.254: 34.29,0 34.29,33.02 ; 56.515,0 56.515,33.02 ; 78.74,0 78.74,33.02 ; 94.562,22.657 95.978,22.657 96.777,21.858 ; 100.965,0 100.965,33.02 ; 123.19,0 123.19,33.02 ; 10.922,1.016 10.922,5.588 15.494,5.588 15.494,1.016 14.859,1.016 10.922,1.016 ; 10.922,106.172 10.922,110.744 15.494,110.744 15.494,106.172 14.859,106.172 10.922,106.172 ; 146.812,1.016 146.812,5.588 151.384,5.588 151.384,1.016 150.749,1.016 146.812,1.016 ; 146.812,106.172 151.384,106.172 151.384,110.744 146.812,110.744 146.812,106.172
  text "Tigershark 3D" at 202.057,113.665 h6.35
  text "Open Source 3D Printer Controller" at 197.612,110.617 h3.43
  text "MOSFETS" at 118.999,104.775 h3.05
  text "FAN-0" at 81.28,102.135 h3.05
  text "FAN-1" at 90.17,102.135 h3.05
  text "S" at 207.264,101.473 h4.44
  text "Z" at 217.297,101.473 h1.91
  text "G" at 227.203,101.473 h8.25
  text "HEAT-1" at 60.071,100.865 h2.54
  text "HEAT-2" at 70.612,100.865 h2.54
  text "HEATBED" at 38.608,100.738 h2.54
  text "HEAT-0" at 49.911,100.738 h2.54
  text "PWR IN 3" at 141.732,95.11 h2.29 r90
  text "12V - 24V" at 143.383,95.11 h2.29 r90
  text "HEATBED" at 119.126,93.599 h3.05
  text "PWR IN 2" at 141.732,84.696 h2.29 r90
  text "12V - 24V" at 143.383,84.696 h2.29 r90
  text "MOTORS/LOGIC" at 119.126,82.296 h3.05
  text "PWR IN 1" at 141.732,73.901 h2.29 r90
  text "12V - 24V" at 143.383,73.901 h2.29 r90
  text "5V 3A" at 151.511,64.008 h3.81 r90
  text "3.3V 2A" at 141.097,34.29 h3.81
  text "ENDSTOPS" at 17.145,33.528 h3.05
  text "GND" at 41.148,33.147 h2.54 r90
  text "STEP" at 43.688,33.147 h2.54 r90
  text "EN" at 46.228,33.147 h2.54 r90
  text "DIR" at 48.768,33.147 h2.54 r90
  text "3.3V" at 51.308,33.147 h2.54 r90
  text "GND" at 63.373,33.147 h2.54 r90
  text "STEP" at 65.913,33.147 h2.54 r90
  text "EN" at 68.453,33.147 h2.54 r90
  text "DIR" at 70.993,33.147 h2.54 r90
  text "3.3V" at 73.533,33.147 h2.54 r90
  text "GND" at 85.598,33.147 h2.54 r90
  text "STEP" at 88.138,33.147 h2.54 r90
  text "EN" at 90.678,33.147 h2.54 r90
  text "DIR" at 93.218,33.147 h2.54 r90
  text "3.3V" at 95.758,33.147 h2.54 r90
  text "GND" at 107.823,33.147 h2.54 r90
  text "STEP" at 110.363,33.147 h2.54 r90
  text "EN" at 112.903,33.147 h2.54 r90
  text "DIR" at 115.443,33.147 h2.54 r90
  text "3.3V" at 117.983,33.147 h2.54 r90
  text "GND" at 130.048,33.147 h2.54 r90
  text "STEP" at 132.588,33.147 h2.54 r90
  text "EN" at 135.128,33.147 h2.54 r90
  text "DIR" at 137.668,33.147 h2.54 r90
  text "3.3V" at 140.208,33.147 h2.54 r90
  text "B" at 124.206,8.382 h7.62
  text "X" at 35.433,8.255 h7.62
  text "Y" at 57.912,8.255 h7.62
  text "Z" at 79.502,8.255 h7.62
  text "A" at 101.981,8.255 h7.62
  text "STEPPER DRIVERS" at 148.59,6.477 h3.05 r90
  text "NEMA23/NEAM17 2A" at 151.003,6.477 h3.05 r90
Bottom Overlay:
  text "Tigershark 3D" at 303.53,86.614 h6.35
  text "G" at 284.099,77.597 h8.25
  text "S" at 293.751,77.216 h4.44
  text "Z" at 303.784,77.216 h1.91
  text "Based On the Work of Ultimachine," at 304.165,73.914 h3.56
  text "Arduino, RepRap, and Synthetos.com" at 304.165,70.993 h3.56
  text "Codeveloped By Adam Vadala-Roth" at 304.165,68.072 h3.56
  text "& Johnny Russel" at 304.165,65.151 h3.56
  text "PCB Designed By Adam Vadala-Roth" at 304.165,62.23 h3.56
Mechanical 15:
  lines w0.254: 9.906,0 152.4,0 152.4,12.7 152.4,111.76 9.906,111.76 9.906,2.794 9.906,0

## Text inside footprints (layer, text, board x,y; h text height)
FAN-1: Mechanical 16 "1" at 96.965,108.902 h1.57 r180
FAN-2: Mechanical 16 "1" at 88.075,108.902 h1.57 r180
FETS: Top Overlay "8" at 73.914,104.521 h1.97; Top Overlay "7" at 68.834,104.521 h1.97; Top Overlay "6" at 63.754,104.521 h1.97; Top Overlay "5" at 58.674,104.521 h1.97; Top Overlay "1" at 38.735,104.521 h1.97; Top Overlay "2" at 43.434,104.521 h1.97; Top Overlay "3" at 48.514,104.521 h1.97; Top Overlay "4" at 53.594,104.521 h1.97
MAX1_EndstopChannel1: Mechanical 16 "1" at 18.732,31.178 h1.57 r270
MAX1_EndstopChannel2: Mechanical 16 "1" at 18.732,9.842 h1.57 r270
MAX1_EndstopChannel3: Mechanical 16 "1" at 18.732,20.511 h1.57 r270
MIN1_EndstopChannel1: Mechanical 16 "1" at 28.003,22.924 h1.57 r90
MIN1_EndstopChannel2: Mechanical 16 "1" at 28.003,1.587 h1.57 r90
MIN1_EndstopChannel3: Mechanical 16 "1" at 28.003,12.255 h1.57 r90
P2_ThermistorChannel1: Mechanical 16 "1" at 130.112,57.468 h1.57 r90
P2_ThermistorChannel2: Mechanical 16 "1" at 130.112,67.246 h1.57 r90
"Power Input1": Top Overlay "4" at 145.415,88.633 h1.97 r270; Top Overlay "3" at 145.415,93.713 h1.97 r270; Top Overlay "2" at 145.415,98.793 h1.97 r270; Top Overlay "1" at 145.415,103.492 h1.97 r270; Top Overlay "5" at 145.415,83.553 h1.97 r270; Top Overlay "6" at 145.415,78.473 h1.97 r270
T2_ThermocoupleChannel1: Mechanical 16 "1" at 116.014,57.468 h1.57 r90
T2_ThermocoupleChannel2: Mechanical 16 "1" at 116.014,67.246 h1.57 r90
U5: Top Overlay "R" at 49.207,60.415 h0.94; Top Overlay "TQFP 144" at 42.993,59.005 h1.26